# Altium PCB FYS_TMC5160_V1.1.PcbDoc
Units mil, origin at the board's own origin, x right, y up, seen from the top; angles counter-clockwise.
Board outline 600 x 800 mil, 6 copper layers (Top, P1, VMOT, GND, SIG, Bottom), stack 60.357 mil thick; 33 components, 45 nets, 158 pads, 85 vias.
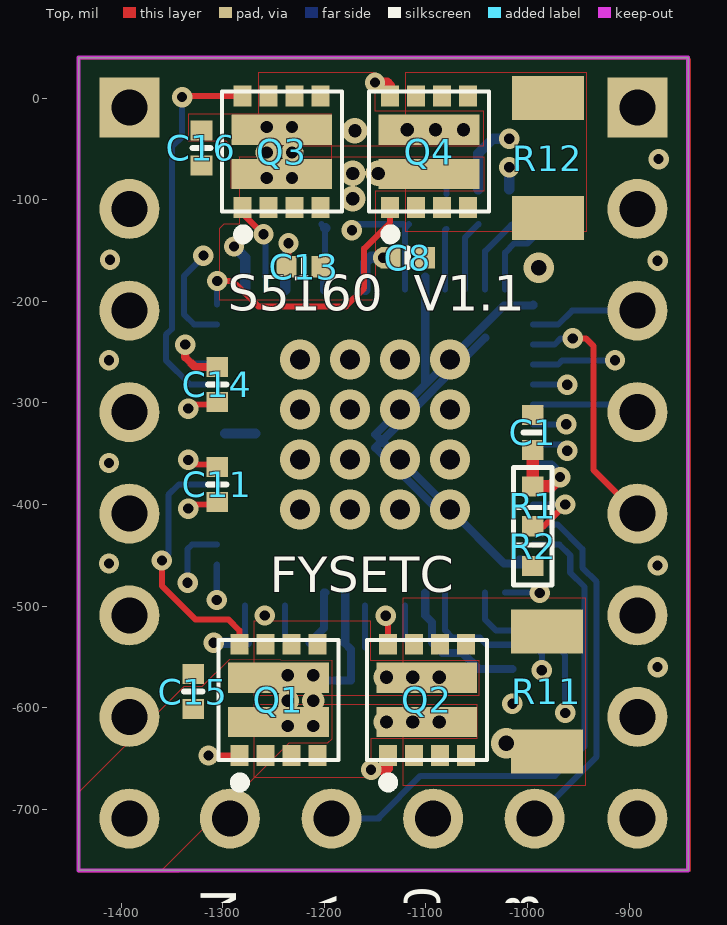
[diagram p0: Top view]
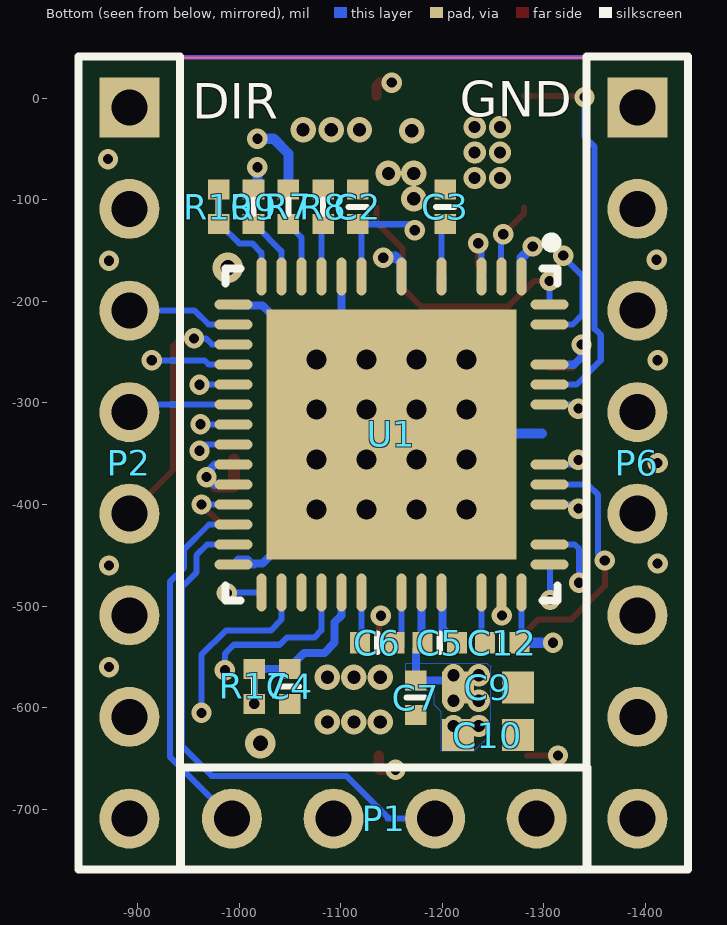
[diagram p1: Bottom view, seen from below]
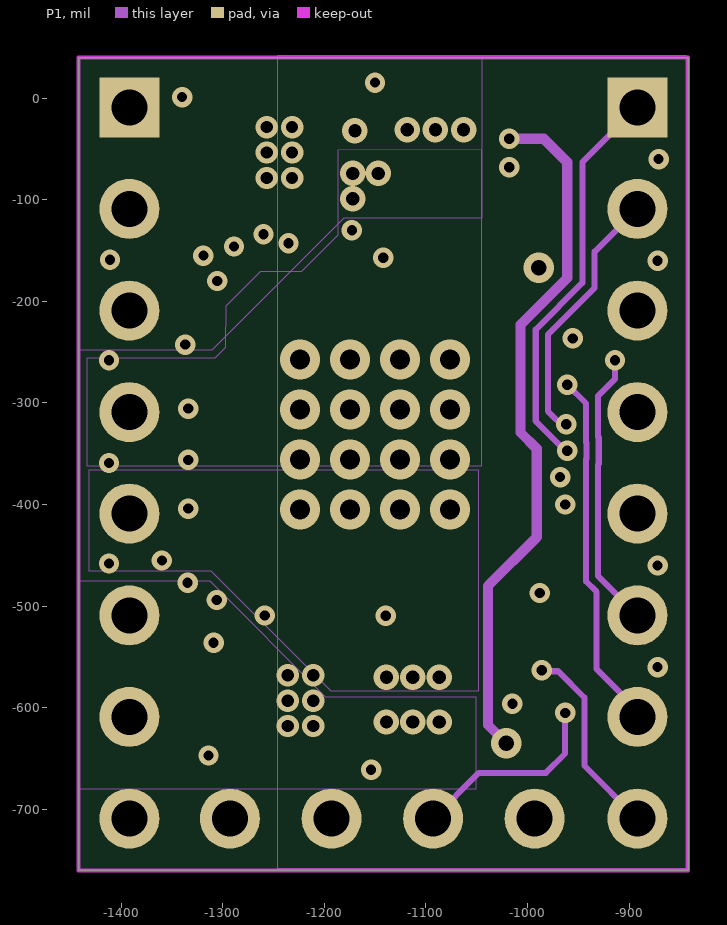
[diagram p2: P1]
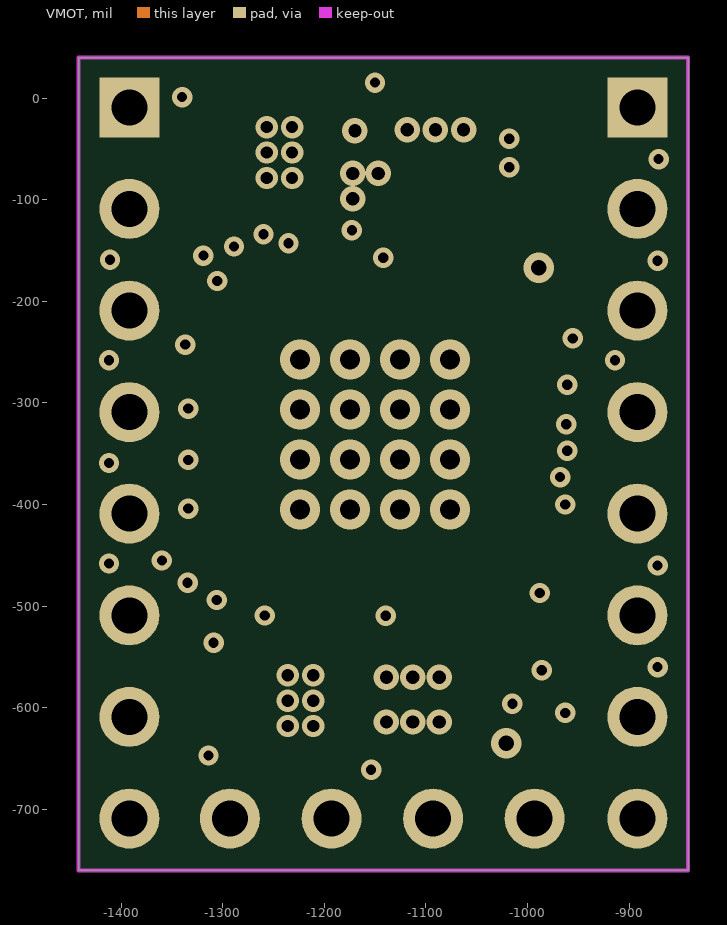
[diagram p3: VMOT]
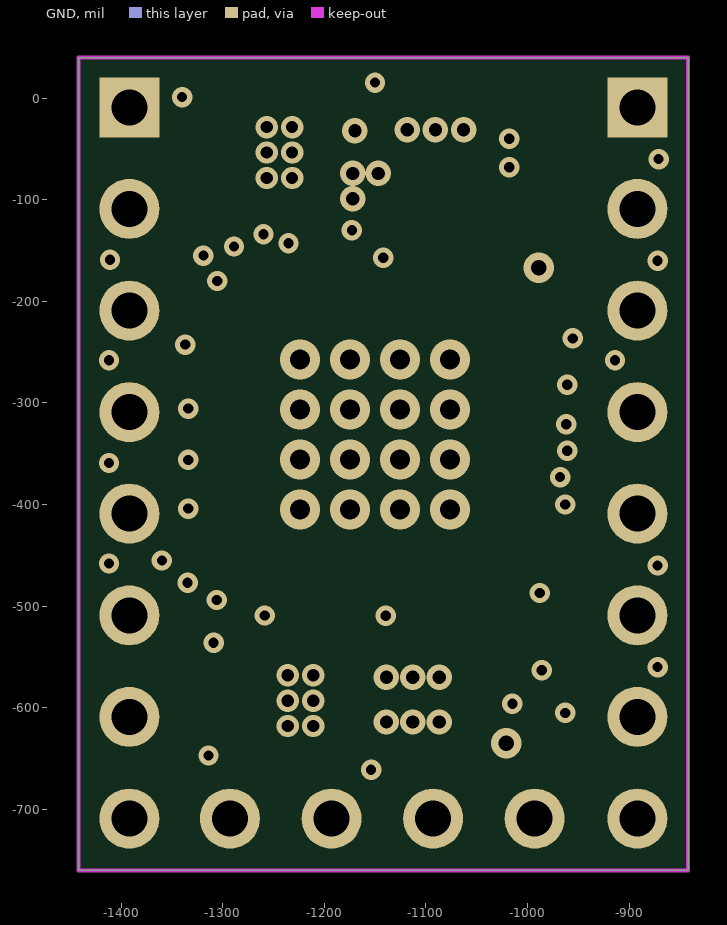
[diagram p4: GND]
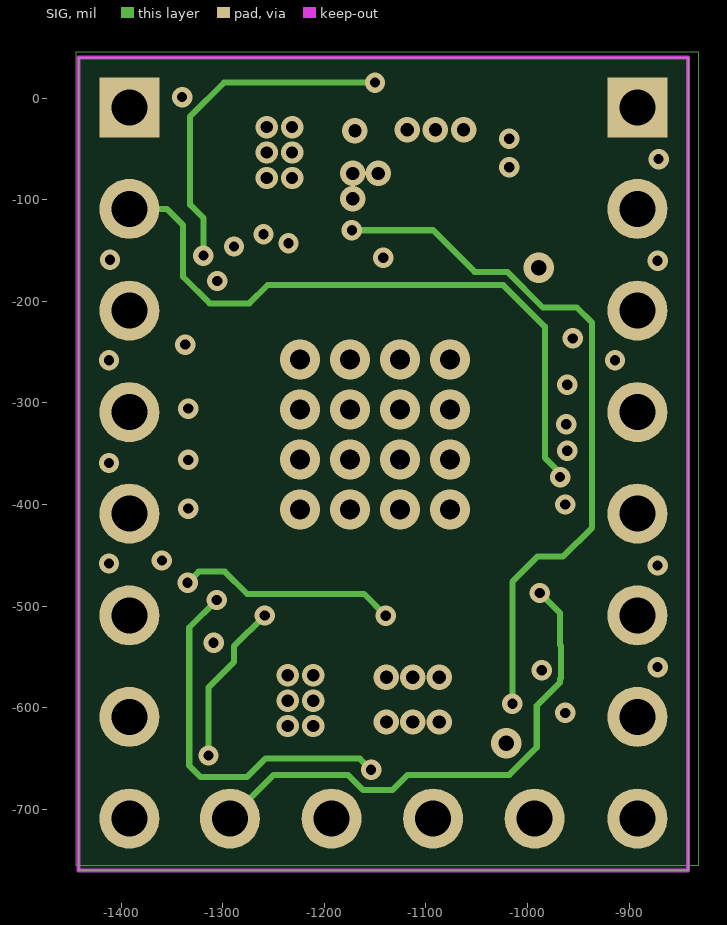
[diagram p5: SIG]

## Layer stack, top to bottom
Top Solder: solder mask 0.4, Solder Resist, Dk 3.5
Top: signal copper 1.378
Dielectric 1: core 10, FR-4, Dk 4.8
P1: signal copper 0.689
Dielectric 2: prepreg 10, FR-4, Dk 4.2
VMOT: signal copper 2.7559
Dielectric 6: prepreg 10, FR-4, Dk 4.2
GND: signal copper 2.7559
Dielectric 5: core 10, FR-4, Dk 4.2
SIG: signal copper 1.4
Dielectric4: core 10, FR-4, Dk 4.2
Bottom: signal copper 1.378
Bottom Solder: solder mask 0.4, Solder Resist, Dk 3.5

## Board outline
-1442,-760 -1442,40 -842,40 -842,-760

## Design rules (kind name [scope] priority, off if disabled: settings)
AssemblyTestPointUsage [All] p0: scope1count=1 scope1_0_kind=Board scope1_0_value=Board scope2count=1 scope2_0_kind=Board scope2_0_value=Board commentlength=0
AssemblyTestpoint [All] p0: scope1count=1 scope1_0_kind=Board scope1_0_value=Board scope2count=1 scope2_0_kind=Board scope2_0_value=Board commentlength=0
Clearance Clearance_1 [All] p0: scope1count=1 scope1_0_kind=Layer scope1_0_value=TOP scope2count=1 scope2_0_kind=Board scope2_0_value=Board commentlength=0 gap=6
Clearance [All] p0: scope1count=1 scope1_0_kind=Board scope1_0_value=Board scope2count=1 scope2_0_kind=Board scope2_0_value=Board commentlength=0 gap=6
Clearance "Mounting Hole Clearance" [All] p0 off: scope1count=1 scope1_0_kind=Board scope1_0_value=Board scope2count=1 scope2_0_kind=Board scope2_0_value=Board commentlength=121 gap=30 // Protel DXP Scope 1 Expression Was: (HoleDiameter >= 110) And  IsPad  And ((PadYSize_AllLayers - HoleDiameter)  <=  1)
Clearance "Fiducial Clearance" [All] p0: scope1count=1 scope1_0_kind=Footprint scope1_0_value=FIDUCIAL_40MIL scope2count=1 scope2_0_kind=Board scope2_0_value=Board commentlength=0 gap=26
Clearance BoardOutlineClearance [All] p0: scope1count=1 scope1_0_kind=Layer scope1_0_value=TOP scope2count=1 scope2_0_kind=Board scope2_0_value=Board commentlength=0 gap=12
Clearance Clearance_1 [OnLayer('Top')] p1: gap=6 ignorepadtopadclearanceinfootprint=TRUE except(0: Arc-Hole Track-Hole SMDPad-Hole THPad-Hole Via-Hole Fill-Hole Poly-Hole Region-Hole Text-Hole; 12: THPad-Poly)
Clearance BoardOutlineClearance [OnLayer('Keep-Out Layer')] p2: gap=12 ignorepadtopadclearanceinfootprint=FALSE
Clearance "Fiducial Clearance" [HasFootprint('FIDUCIAL_40MIL')] p3: gap=26 ignorepadtopadclearanceinfootprint=FALSE except(0: Arc-Hole Track-Hole SMDPad-Hole THPad-Hole Via-Hole Fill-Hole Poly-Hole Region-Hole Text-Hole)
Clearance "Mounting Hole Clearance" [(HoleDiameter >= 110) And  IsPad  And ((PadYSize_AllLayers - HoleDiameter)  <=  1)] p4: gap=30 ignorepadtopadclearanceinfootprint=FALSE except(0: Arc-Hole Track-Hole SMDPad-Hole THPad-Hole Via-Hole Fill-Hole Poly-Hole Region-Hole Text-Hole)
Clearance [All] p5: gap=6 ignorepadtopadclearanceinfootprint=TRUE except(0: Arc-Hole Track-Hole SMDPad-Hole THPad-Hole Via-Hole Fill-Hole Poly-Hole Region-Hole Text-Hole)
ComponentClearance Pinheader2PinheaderClearance [All] p0: scope1count=1 scope1_0_kind=ComponentClass scope1_0_value=Pinheader scope2count=1 scope2_0_kind=ComponentClass scope2_0_value=Pinheader commentlength=0 gap=0 collisioncheckmode=3
ComponentClearance [All] p0: scope1count=1 scope1_0_kind=Board scope1_0_value=Board scope2count=1 scope2_0_kind=Board scope2_0_value=Board commentlength=0 gap=0 collisioncheckmode=3
ComponentClearance Pinheader2PinheaderClearance [InComponentClass('Pinheader') vs InComponentClass('Pinheader')] p1: gap=0 collisioncheckmode=3 verticalgap=0 showdistances=FALSE
ComponentClearance [All] p2: gap=0 collisioncheckmode=3 verticalgap=100000 showdistances=FALSE
DiffPairsRouting [All] p0 off: scope1count=1 scope1_0_kind=Board scope1_0_value=Board scope2count=1 scope2_0_kind=Board scope2_0_value=Board commentlength=0
DiffPairsRouting [All] p1 off: maxlimit=10 minlimit=7.5 mostfreqgap=10 toplayer_prefgap=7.5 toplayer_minwidth=7.5 toplayer_maxwidth=7.5 toplayer_prefwidth=7.5 midlayer1_prefgap=7.5 midlayer1_minwidth=7.5 midlayer1_maxwidth=7.5 midlayer1_prefwidth=7.5 midlayer2_mingap=10 midlayer2_minwidth=15 midlayer2_maxwidth=15 midlayer2_prefwidth=15 midlayer3_mingap=10 midlayer3_minwidth=15 midlayer3_maxwidth=15 midlayer3_prefwidth=15 midlayer4_mingap=10 midlayer4_minwidth=15 midlayer4_maxwidth=15 midlayer4_prefwidth=15 bottomlayer_prefgap=7.5 bottomlayer_minwidth=7.5 bottomlayer_maxwidth=7.5 bottomlayer_prefwidth=7.5 maxuncoupledlength=500
FabricationTestPointUsage [All] p0: scope1count=1 scope1_0_kind=Board scope1_0_value=Board scope2count=1 scope2_0_kind=Board scope2_0_value=Board commentlength=0 valid=0 allowmultiple=FALSE
FabricationTestpoint [All] p0: scope1count=1 scope1_0_kind=Board scope1_0_value=Board scope2count=1 scope2_0_kind=Board scope2_0_value=Board commentlength=0 side=3 testpointundercomponent=TRUE minsize=40 maxsize=100 preferedsize=60 minholesize=0 maxholesize=40 preferedholesize=32 testpointgrid=1
FanoutControl Fanout_Default [All] p0: scope1count=1 scope1_0_kind=Board scope1_0_value=Board scope2count=1 scope2_0_kind=Board scope2_0_value=Board commentlength=30 // Fanout_Default (Default Rule)
FanoutControl Fanout_Small [All] p0 off: scope1count=1 scope1_0_kind=Board scope1_0_value=Board scope2count=1 scope2_0_kind=Board scope2_0_value=Board commentlength=84 // Protel DXP Scope 1 Expression Was: (CompPinCount < 5)   Fanout_Small (Default Rule)
FanoutControl Fanout_SOIC [All] p0 off: scope1count=1 scope1_0_kind=Board scope1_0_value=Board scope2count=1 scope2_0_kind=Board scope2_0_value=Board commentlength=71 // Protel DXP Scope 1 Expression Was: IsSOIC   Fanout_SOIC (Default Rule)
FanoutControl Fanout_LCC [All] p0 off: scope1count=1 scope1_0_kind=Board scope1_0_value=Board scope2count=1 scope2_0_kind=Board scope2_0_value=Board commentlength=69 // Protel DXP Scope 1 Expression Was: IsLCC   Fanout_LCC (Default Rule)
FanoutControl Fanout_BGA [All] p0 off: scope1count=1 scope1_0_kind=Board scope1_0_value=Board scope2count=1 scope2_0_kind=Board scope2_0_value=Board commentlength=69 // Protel DXP Scope 1 Expression Was: IsBGA   Fanout_BGA (Default Rule)
Height [All] p0: scope1count=1 scope1_0_kind=Board scope1_0_value=Board scope2count=1 scope2_0_kind=Board scope2_0_value=Board commentlength=0
HoleSize [All] p0: scope1count=1 scope1_0_kind=Board scope1_0_value=Board scope2count=1 scope2_0_kind=Board scope2_0_value=Board commentlength=0 absolutevalues=TRUE maxlimit=100000 minlimit=7.87 maxpercent=80.000 minpercent=20.000
HoleSize [All] p1: absolutevalues=TRUE maxlimit=100000 minlimit=7.87 maxpercent=80.000 minpercent=20.000
HoleToHoleClearance [All] p0: scope1count=1 scope1_0_kind=Board scope1_0_value=Board scope2count=1 scope2_0_kind=Board scope2_0_value=Board commentlength=0
HoleToHoleClearance [All] p1: gap=8 allowstackedmicrovias=TRUE
LayerPairs [All] p0: scope1count=1 scope1_0_kind=Board scope1_0_value=Board scope2count=1 scope2_0_kind=Board scope2_0_value=Board commentlength=0 enforce=TRUE
MatchedLengths "SD_CARD MatchedLengths" [All] p0: scope1count=1 scope1_0_kind=NetClass scope1_0_value=SD_CARD scope2count=1 scope2_0_kind=Board scope2_0_value=Board commentlength=0 tolerance=10 amplitude=200 gap=20 style=90-Degree
MatchedLengths "SD_CARD MatchedLengths" [InNetClass('SD_CARD')] p1: tolerance=10 checknetsindiffpair=FALSE checkdiffpairvsdiffpair=TRUE checkxsignals=TRUE checkothers=TRUE
MinimumAnnularRing MinimumViaAnnualRing [All] p0: scope1count=1 scope1_0_kind=Board scope1_0_value=Board scope2count=1 scope2_0_kind=Board scope2_0_value=Board commentlength=0 minimumring=4.92
MinimumAnnularRing MinimumViaAnnualRing [All] p1: minimumring=4.92
MinimumSolderMaskSliver STM32_MinimumSolderMaskSliver [All] p0 off: scope1count=1 scope1_0_kind=Board scope1_0_value=Board scope2count=1 scope2_0_kind=Board scope2_0_value=Board commentlength=84 // Protel DXP Scope 2 Expression Was: (InComponent('STM1') AND InComponent('STM2'))
MinimumSolderMaskSliver USB_HUB_MinimumSolderMaskSliver [All] p0: scope1count=1 scope1_0_kind=Component scope1_0_value=USB_HUB scope2count=1 scope2_0_kind=Board scope2_0_value=Board commentlength=0
MinimumSolderMaskSliver [All] p0 off: scope1count=1 scope1_0_kind=Board scope1_0_value=Board scope2count=1 scope2_0_kind=Board scope2_0_value=Board commentlength=0
MinimumSolderMaskSliver STM32_MinimumSolderMaskSliver [(InComponent('STM1') AND InComponent('STM2')) vs (InComponent('STM1') AND InComponent('STM2'))] p1: minsoldermaskwidth=1
MinimumSolderMaskSliver USB_HUB_MinimumSolderMaskSliver [InComponent('USB_HUB')] p2: minsoldermaskwidth=1
MinimumSolderMaskSliver [All] p3 off: minsoldermaskwidth=1.5
NetAntennae [All] p0: scope1count=1 scope1_0_kind=Board scope1_0_value=Board scope2count=1 scope2_0_kind=Board scope2_0_value=Board commentlength=0
PasteMaskExpansion [All] p0: scope1count=1 scope1_0_kind=Board scope1_0_value=Board scope2count=1 scope2_0_kind=Board scope2_0_value=Board commentlength=0 expansion=0
PasteMaskExpansion TestPadPasteMaskExpansion [All] p0: scope1count=1 scope1_0_kind=Footprint scope1_0_value=SMD_TP_2X2_ROUND scope2count=1 scope2_0_kind=Board scope2_0_value=Board commentlength=0 expansion=-78.74
PasteMaskExpansion TestPadPasteMaskExpansion [HasFootprint('SMD_TP_2X2_ROUND')] p1: expansion=-78.74
PasteMaskExpansion [All] p2: expansion=0
PlaneClearance [All] p0: scope1count=1 scope1_0_kind=Board scope1_0_value=Board scope2count=1 scope2_0_kind=Board scope2_0_value=Board commentlength=0 clearance=20
PlaneConnect [All] p0: scope1count=1 scope1_0_kind=Board scope1_0_value=Board scope2count=1 scope2_0_kind=Board scope2_0_value=Board commentlength=0 planeconnectstyle=Direct reliefexpansion=20 reliefentries=4 reliefconductorwidth=10 reliefairgap=10
PlaneConnect [All] p1: planeconnectstyle=Direct reliefexpansion=20 reliefentries=4 reliefconductorwidth=10 reliefairgap=10
PolygonConnect [All] p0: scope1count=1 scope1_0_kind=Board scope1_0_value=Board scope2count=1 scope2_0_kind=Board scope2_0_value=Board commentlength=0 connectstyle=Direct reliefconductorwidth=15 reliefentries=4 polygonreliefangle="90 Angle"
PolygonConnect ThermalVias [All] p0 off: scope1count=1 scope1_0_kind=Board scope1_0_value=Board scope2count=1 scope2_0_kind=Board scope2_0_value=Board commentlength=44 connectstyle=Direct reliefconductorwidth=10 reliefentries=4 polygonreliefangle="90 Angle" // Protel DXP Scope 1 Expression Was: IsVia
PolygonConnect MotorOutputConStyle [All] p0: scope1count=1 scope1_0_kind=NetClass scope1_0_value=MotorPowerOut scope2count=1 scope2_0_kind=Board scope2_0_value=Board commentlength=0 connectstyle=Direct reliefconductorwidth=10 reliefentries=4 polygonreliefangle="90 Angle"
PolygonConnect SA_SB_PolygonConnect [All] p0 off: scope1count=1 scope1_0_kind=Board scope1_0_value=Board scope2count=1 scope2_0_kind=Board scope2_0_value=Board commentlength=65 connectstyle=Direct reliefconductorwidth=70 reliefentries=4 polygonreliefangle="90 Angle" // Protel DXP Scope 1 Expression Was: InNet('SA') OR InNet('SB')
PolygonConnect VM_PolygonConnect [All] p0: scope1count=1 scope1_0_kind=Net scope1_0_value=+VM scope2count=1 scope2_0_kind=Board scope2_0_value=Board commentlength=0 connectstyle=Direct reliefconductorwidth=70 reliefentries=4 polygonreliefangle="90 Angle"
PolygonConnect SA_SB_PolygonConnect [InNet('SA') OR InNet('SB')] p1: connectstyle=Direct reliefconductorwidth=70 reliefentries=4 polygonreliefangle="90 Angle" airgapwidth=10
PolygonConnect VM_PolygonConnect [InNet('+VM')] p2: connectstyle=Direct reliefconductorwidth=70 reliefentries=4 polygonreliefangle="90 Angle" airgapwidth=10
PolygonConnect ThermalVias [IsVia] p3: connectstyle=Direct reliefconductorwidth=10 reliefentries=4 polygonreliefangle="90 Angle" airgapwidth=10
PolygonConnect MotorOutputConStyle [InNetClass('MotorPowerOut')] p4: connectstyle=Direct reliefconductorwidth=10 reliefentries=4 polygonreliefangle="90 Angle" airgapwidth=10
PolygonConnect [All] p5: connectstyle=Direct reliefconductorwidth=15 reliefentries=4 polygonreliefangle="90 Angle" airgapwidth=10
RoutingCorners [All] p0: scope1count=1 scope1_0_kind=Board scope1_0_value=Board scope2count=1 scope2_0_kind=Board scope2_0_value=Board commentlength=0 cornerstyle=45-Degree minsetback=100 maxsetback=100
RoutingLayers [All] p0: scope1count=1 scope1_0_kind=Board scope1_0_value=Board scope2count=1 scope2_0_kind=Board scope2_0_value=Board commentlength=0 top layer=Automatic mid layer 1=Automatic mid layer 2=Automatic mid layer 3=Automatic mid layer 4=Automatic bottom layer=Automatic
RoutingPriority [All] p0: scope1count=1 scope1_0_kind=Board scope1_0_value=Board scope2count=1 scope2_0_kind=Board scope2_0_value=Board commentlength=0
RoutingTopology [All] p0: scope1count=1 scope1_0_kind=Board scope1_0_value=Board scope2count=1 scope2_0_kind=Board scope2_0_value=Board commentlength=0 topology=Shortest
RoutingVias [All] p0: scope1count=1 scope1_0_kind=Board scope1_0_value=Board scope2count=1 scope2_0_kind=Board scope2_0_value=Board commentlength=0 holewidth=12 width=22 viastyle="Through Hole" minholewidth=12 minwidth=22 maxholewidth=12 maxwidth=50
RoutingVias [All] p1: holewidth=12 width=22 viastyle="Through Hole" minholewidth=12 minwidth=22 maxholewidth=12 maxwidth=50
ShortCircuit [All] p0 off: scope1count=1 scope1_0_kind=Board scope1_0_value=Board scope2count=1 scope2_0_kind=Board scope2_0_value=Board commentlength=0 allowed=FALSE
ShortCircuit [All] p1 off: allowed=FALSE
SilkToBoardRegionClearance [All] p0 off: scope1count=1 scope1_0_kind=Board scope1_0_value=Board scope2count=1 scope2_0_kind=Board scope2_0_value=Board commentlength=0
SilkToBoardRegionClearance [All] p1 off:
SilkToSilkClearance [All] p0 off: scope1count=1 scope1_0_kind=Board scope1_0_value=Board scope2count=1 scope2_0_kind=Board scope2_0_value=Board commentlength=0
SilkToSilkClearance [All] p1 off: silktosilkclearance=10
SilkToSolderMaskClearance [All] p0 off: scope1count=1 scope1_0_kind=Board scope1_0_value=Board scope2count=1 scope2_0_kind=Board scope2_0_value=Board commentlength=44 // Protel DXP Scope 1 Expression Was: IsPad
SilkToSolderMaskClearance [IsPad] p1 off: minsilkscreentomaskgap=10 clearancetoexposedcopper=TRUE
SolderMaskExpansion [All] p0: scope1count=1 scope1_0_kind=Board scope1_0_value=Board scope2count=1 scope2_0_kind=Board scope2_0_value=Board commentlength=0 expansion=4
SolderMaskExpansion FiducialSolderMaskExpansion [All] p0: scope1count=1 scope1_0_kind=Footprint scope1_0_value=FIDUCIAL_40MIL scope2count=1 scope2_0_kind=Board scope2_0_value=Board commentlength=0 expansion=26
SolderMaskExpansion FiducialSolderMaskExpansion [HasFootprint('FIDUCIAL_40MIL')] p1: expansion=26
SolderMaskExpansion [All] p2: expansion=4
UnRoutedNet [All] p0 off: scope1count=1 scope1_0_kind=Board scope1_0_value=Board scope2count=1 scope2_0_kind=Board scope2_0_value=Board commentlength=0
UnRoutedNet [All] p1 off:
UnpouredPolygon [All] p0: scope1count=1 scope1_0_kind=Board scope1_0_value=Board scope2count=1 scope2_0_kind=Board scope2_0_value=Board commentlength=0
Width VIN_Width [All] p0: scope1count=1 scope1_0_kind=NetClass scope1_0_value=PWR_VIN scope2count=1 scope2_0_kind=Board scope2_0_value=Board commentlength=0 maxlimit=300 minlimit=200 preferedwidth=210
Width Other_Width [All] p0: scope1count=1 scope1_0_kind=Board scope1_0_value=Board scope2count=1 scope2_0_kind=Board scope2_0_value=Board commentlength=0 maxlimit=100000 minlimit=5 preferedwidth=11.81
Width VIN_Width [InNetClass('PWR_VIN')] p1: maxlimit=300 minlimit=200 preferedwidth=210
Width Other_Width [All] p2: maxlimit=100000 minlimit=5 preferedwidth=11.81 midlayer3_prefwidth=10 midlayer4_prefwidth=10 minimp=50.000000 maximp=50.000000 favimp=50.000000
18 further rules are at their usual default settings.

## Classes and differential pairs
net class MotorPowerOut: BMA1 BMA2 BMB1 BMB2

## Components (designator, comment, footprint, x,y, rotation, side; value= is the part's Value field where it differs from the comment)
C1 "100nF" CAP0402_NS -995,-329 r90 top
C2 "2u2" CAP0402_NS -1117,-107 r90 bottom
C3 "2u2" CAP0402_NS -1203,-107 r270 bottom
C4 "470nF" CAP0402_NS -1050.07,-579 r270 bottom
C5 "100nF" CAP0402_NS -1197.5,-536 r180 bottom
C6 "22nF" CAP0402_NS -1136,-536 r180 bottom
C7 "100nF" CAP0402_NS -1174,-590.06 r270 bottom
C8 "100nF" CAP0402_NS -1117.94,-157 r0 top
C9 "10uF/50V/10%" CAP0603 -1245,-580 r0 bottom
C10 "10uF/50V/10%" CAP0603 -1245,-627 r0 bottom
C11 "220nF" CAP0402_NS -1305.51,-380.21 r270 top
C12 "220nF" CAP0402_NS -1259,-536 r180 bottom
C13 "220nF" CAP0402_NS -1220,-166 r0 top
C14 "220nF" CAP0402_NS -1305.51,-281.79 r90 top
C15 "470nF/50V" CAP0402_NS -1329,-584 r90 top
C16 "470nF/50V" CAP0402_NS -1321,-49 r270 top
P1 "Header 4" HDR1X4 -993,-709 r180 bottom locked
P2 "Header 8" HDR1X8 -892,-9 r270 bottom locked
P6 "Header 8" HDR1X8 -1392,-9 r270 bottom locked
Q1 "FDMC9430L" DFN3X3-511DG -1410.18,-592.5 r0 top locked
Q2 "FDMC9430L" DFN3X3-511DG -1264.18,-592.5 r0 top locked
Q3 "FDMC9430L" DFN3X3-511DG -1407,-53 r0 top locked
Q4 "FDMC9430L" DFN3X3-511DG -1262,-53 r0 top locked
R1 "0R" RES0402 -995,-401.68 r270 top
R2 "0R" RES0402 -995,-441 r270 top
R7 "47R /  / 1%" RES0402_NS -1048.5,-107 r270 bottom
R8 "47R /  / 1%" RES0402_NS -1082.75,-107 r270 bottom
R9 "47R /  / 1%" RES0402_NS -1014.25,-107 r270 bottom
R10 "47R /  / 1%" RES0402_NS -980,-106.68 r270 bottom
R11 "75mR" R1206 -981,-584 r90 top
R12 "75mR" R1206 -980,-59 r270 top
R17 "2R2/1%/" RES0402_NS -1015,-579 r90 bottom
U1 "TMC5160_WA" "QFN8X8 WETTABLE" -1150,-331 r270 bottom

## Footprints (in the part's own frame and the unit in brackets; to place one, negate y for a bottom-side part, rotate by r counter-clockwise, add the part's x,y. Pads: shape width x height; smd on the part's side, far side on the other; paste and mask are expansions set on the pad)
CAP0402_NS [mm]
  rect 0.5x0.54 smd: 1(-0.433,0) 2(0.433,0)
  silkscreen extent 0,-0.23 0,0.23
CAP0603 [mm]
  rect 0.8x0.8 smd mask+0: 1(-0.75,0) 2(0.75,0)
DFN3X3-511DG [mm] "QFN, 8-Leads, Body 3.15x3.00mm, Pitch 0.65mm, Thermal Pad 2.45x1.74mm, IPC Medium Density"
  rect 0.45x0.52 smd: 1(3.216,-1.386) 2(3.866,-1.386) 3(4.516,-1.386) 4(5.166,-1.386) 5(5.166,1.398) 6(4.516,1.398) 7(3.866,1.398) 8(3.216,1.398)
  rect 2.52x0.755 smd: 9(4.191,-0.546) 10(4.191,0.559)
  silkscreen extent 2.69,-2.18 5.69,1.51
HDR1X4 [mm] "Connector; Header; 4 Position"
  round 1.5 hole 0.9 mask+0: 1(0,0) 2(2.54,0) 3(5.08,0) 4(7.62,0)
  silkscreen extent -1.27,-1.27 8.89,1.27
HDR1X8 [mm] "Connector; Header; 8 Position"
  rect 1.5x1.5 hole 0.9 mask+0: 1(0,0)
  round 1.5 hole 0.9 mask+0: 2(2.54,0) 3(5.08,0) 4(7.62,0) 5(10.16,0) 6(12.7,0) 7(15.24,0) 8(17.78,0)
  silkscreen extent -1.27,-1.27 19.05,1.27
"QFN8X8 WETTABLE" [mm] "QFN, 56-Leads, Body 8.00x8.00mm, Pitch 0.50mm, Thermal Pad 6.25x6.25mm, IPC Low Density"
  oval 0.95x0.25 smd mask+0: 1(-3.95,3.25) 2(-3.95,2.75) 3(-3.95,2.25) 4(-3.95,1.25) 5(-3.95,0.25) 6(-3.95,-0.75) 7(-3.95,-1.25) 8(-3.95,-1.75) 9(-3.95,-2.25) 10(-3.95,-2.75) 11(-3.95,-3.25) 26(3.95,-3.25) 27(3.95,-2.75) 28(3.95,-2.25) 29(3.95,-1.75) 30(3.95,-1.25) 31(3.95,-0.75) 32(3.95,0.25) 33(3.95,0.75) 34(3.95,1.25) 35(3.95,2.25) 36(3.95,2.75) 37(3.95,3.25)
  oval 0.25x0.95 smd mask+0: 12(-3.25,-3.95) 13(-2.75,-3.95) 14(-2.25,-3.95) 15(-1.75,-3.95) 16(-1.25,-3.95) 17(-0.75,-3.95) 18(-0.25,-3.95) 19(0.25,-3.95) 20(0.75,-3.95) 21(1.25,-3.95) 22(1.75,-3.95) 23(2.25,-3.95) 24(2.75,-3.95) 25(3.25,-3.95) 38(3.25,3.95) 39(2.75,3.95) 40(1.75,3.95) 41(1.25,3.95) 42(0.75,3.95) 43(-0.75,3.95) 44(-1.25,3.95) 45(-1.75,3.95) 46(-2.75,3.95) 47(-3.25,3.95)
  rect 6.25x6.25 smd mask+0: 48(0,0)
  silkscreen extent -4.92,-4.15 4.15,4.15
R1206 [mm] "1206 resistor"
  rect 1.1x1.8 smd mask+0: 1(-1.5,0) 2(1.5,0)
RES0402 [mm]
  rect 0.5x0.54 smd mask+0: 1(-0.5,0) 2(0.5,0)
  silkscreen extent -0.97,-0.48 0.97,0.48
RES0402_NS [mm]
  rect 0.5x0.54 smd: 1(-0.433,0) 2(0.433,0)
  silkscreen extent -0.18,0 0.18,0

## Part data
C1 C4 C5 C6 C7 C8: library part Capacitor, "Ceramic capacitor"
C2 C3: library part "2.2 μF, 25 V, ± 10%, X5R, GRM Series", "SMD Multilayer Ceramic Capacitor, 0603 [1608 Metric], 2.2 μF, 25 V, ± 10%, X5R, GRM Series"
C9 C10: library part "10 μF, 50 V, ± 20%, X5R, GRM Series", "SMD Multilayer Ceramic Capacitor, 1206 [3216 Metric], 10 μF, 50 V, ± 20%, X5R, GRM Series"
C11 C12 C13 C14: library part "0.22 μF, 50 V, ± 10%, X7R", "SMD Multilayer Ceramic Capacitor, 0603 [1608 Metric], 0.22 μF, 50 V, ± 10%, X7R, GCM Series"
C15 C16: library part "0.47 μF, 50 V, ± 10%, X7R, C Series", "SMD Multilayer Ceramic Capacitor, 0603 [1608 Metric], 0.47 μF, 50 V, ± 10%, X7R, C Series"
P1: "Header, 4-Pin"
P2 P6: "Header, 8-Pin"
R1 R2: library part "0 ohm, 0603 [1608 Metric], 100 mW, MCWR Series", "SMD Chip Resistor, Thick Film, 0 ohm, 0603 [1608 Metric], 100 mW, MCWR Series"
R7 R8 R9 R10: library part "47 ohm, 75 V, 0603 [1608 Metric], 100 mW, ± 1%, MCSR 06 Series", "SMD Chip Resistor, Ceramic, 47 ohm, 75 V, 0603 [1608 Metric], 100 mW, ± 1%, MCSR 06 Series"
R11 R12: library part "R_SENS, 0.075 ohm, 1206, 1W, ± 1%, ERJ Series", "SMD Chip Resistor, Thick Film, Current Sense Resistors - SMD 1W 0.075ohm 1%"
R17: library part Resistor, "Resistor"

## Via types
v1: diameter 20, hole 10, Top to Bottom, tented both sides, 42 vias
v2: diameter 39.37, hole 19.68, Top to Bottom, tented both sides, 16 vias
v3: diameter 25, hole 13, Top to Bottom, tented both sides, 13 vias
v4: diameter 22, hole 12, Top to Bottom, tented both sides, 12 vias
v5: diameter 30, hole 15, Top to Bottom, tented both sides, 2 vias

## Nets (pads, with @x,y where several pads share a name; then routed paths per layer and width w, separated by ;. In a path a pad name is that pad's centre, name@x,y a point inside that pad or via, vN(x,y) a via of type N, cw(c..) or ccw(c..) an arc to the next point about the centre after c; other vN are vias at no path point)
5V_OUT: C2.1 R17.1 U1.6 | length 815.6
  SIG w6: v1(-1173,-130) -1093,-130 -1052,-171 -1020,-171 -985,-206 -951.58,-206 -936.58,-221 -936.58,-422.58 -965,-451 -990,-451 -1015,-476 v1(-1015,-596)
  Bottom w6: v1(-1173,-130) -1167.06,-124.06 C2.1@-1122,-124.06 ; U1.6@-1120.47,-188.49 U1.6 -1120.47,-128.16 -1120.47,-127.53 C2.1
+VM: C5.1 C7.1 C8.1 C9.2 C10.2 C15.1 C16.1 P6.8 Q1.9 Q1.10 Q3.9 Q3.10 U1.5 U1.33 | length 209.7
  Top w10: v1(-1142,-157) -1137,-157 C8.1@-1136,-156
  Bottom w8: C9.2@-1211.47,-580 -1204.47,-573 C7.1 -1174,-542.44 C5.1 -1179.53,-535.09 U1.33
  Bottom w10: U1.5@-1159.84,-188.49 U1.5@-1159.84,-161.84 ; U1.5 U1.5@-1159.84,-161.84 ; U1.5@-1159.84,-161.84 -1154,-156 ; -1154,-156 -1143,-156 v1(-1142,-157) -1153,-157 -1154,-156
  other v4: -1236,-618 -1211,-618 -1236,-593 -1211,-593 -1236,-568 -1211,-568 -1256.81,-78.5 -1231.81,-78.5 -1256.81,-53.5 -1231.81,-53.5 -1256.81,-28.5 -1231.81,-28.5
BMA1: C11.2 P6.5 Q1.5 Q1.6 Q1.7 Q2.10 U1.40 | length 60.4
  Top w6: v1(-1334,-404) -1329.9,-399.9 C11.2@-1305.51,-399.9
  Bottom w6: v1(-1334,-404) -1329.9,-399.9 U1.40
  other v3: -1139,-570 -1113,-570 -1087,-570
BMA2: C12.2 P6.6 Q1.2 Q1.3 Q1.4 Q2.9 U1.37 | length 67.6
  Bottom w6: U1.37@-1277.95,-499.51 -1277.95,-533.73 C12.2@-1277.68,-534
  Bottom w10: v1(-1309,-536) C12.2
  other v3: -1139,-614 -1113,-614 -1087,-614
BMB1: C13.2 P6.4 Q3.2 Q3.3 Q3.4 Q4.9 U1.1 | length 47.1
  Bottom w10: v1(-1289,-146) -1277.95,-157.05 U1.1 U1.1@-1277.95,-188.49
  other v3: -1172,-99 -1172,-74 -1147,-74
BMB2: C14.2 P6.3 Q3.5 Q3.6 Q3.7 Q4.10 U1.45 | length 94.8
  Top w8: v1(-1337,-242.57) -1337,-255 -1327.25,-264.75 C14.2
  Bottom w8: v1(-1337,-242.57) -1337,-255 -1329.9,-262.1 U1.45
  other v3: -1170,-32 -1118.5,-31 -1090.75,-31 -1063,-31
CA1: C11.1 U1.42 | length 60.7
  Top w6: v1(-1334,-356) -1329.47,-360.53 C11.1@-1305.51,-360.53
  Bottom w6: v1(-1334,-356) -1329.47,-360.53 U1.42
CA2: C12.1 U1.35 | length 34.5
  Bottom w6: C12.1@-1238.58,-534 U1.35@-1238.58,-499.51
CB1: C13.1 U1.3 | length 73.5
  Top w6: C13.1@-1240.94,-171.31 C13.1@-1240.94,-166 ; C13.1 -1235.41,-164.35 v1(-1235.41,-142.83)
  Bottom w6: U1.3 v1@-1238.58,-142.83 ; U1.3@-1237.27,-177.7 U1.3@-1237.27,-175.49
  Bottom w10: U1.3@-1238.58,-188.49 U1.3@-1238.58,-179.01
CB2: C14.1 U1.43 | length 60.4
  Top w6: v1(-1334,-305.57) -1329.9,-301.47 C14.1@-1305.51,-301.47
  Bottom w6: v1(-1334,-305.57) -1329.9,-301.47 U1.43
CLK16: P2.3 U1.13 | length 108.2
  Bottom w6: U1.13 -970,-222.73 -956.27,-209 P2.3
CSN: P2.5 U1.14 | length 252.9
  Top w6: v1(-955.58,-236.42) -942.61,-236.42 -935,-244.02 -935,-366 P2.5
  Bottom w6: U1.14 -973.42,-242.42 -967.42,-236.42 v1(-955.58,-236.42) v1@-950.58,-236.42
DIAG0/ERROR: P1.2 U1.27 | length 365.4
  P1 w6: P1.2 -1048,-664 -982,-664 -963,-645 v1(-963,-605)
  Bottom w6: U1.27 -1041.73,-513.27 -1031,-524 -987,-524 -963,-548 v1@-963,-597
DIAG1/INDEX: U1.28
DIR/REFR: P2.1 U1.19 | length 432.9
  P1 w6: v1(-961,-347) -962.87,-347 -992,-317.87 -992,-227.8 -946,-181.8 -946,-63 P2.1
  Bottom w6: U1.19 -967.16,-340.84 v1(-961,-347) ; v1@-958.5,-344.5 v1@-956,-347
DRV_ENN: P2.8 U1.29 | length 351.4
  P1 w6: v1@-986,-564 -970,-564 -944,-590 -944,-657 P2.8
  Bottom w6: U1.29 -1081.1,-523.9 -1074,-531 -1047,-531 -1040,-538 -995,-538 -987.95,-545.05 -986,-547 v1(-986,-563)
ENCA: P1.3 U1.24 | length 513.9
  Bottom w6: P1.3 -1146.23,-709 -1146.23,-707.74 -1105.49,-667 -973.03,-667 -944,-637.97 -944,-481 -958,-467 -958,-450 -968.73,-439.27 U1.24
ENCB: P1.1 U1.23 | length 354.7
  Bottom w6: U1.23 -970.42,-419.58 -946,-444 -946,-462.03 -932,-476.03 -932,-648 P1.1
ENCN: P1.4 U1.26 | length 539.2
  SIG w6: P1.4 -1250,-666 -1176.87,-666 -1161.87,-681 -1133,-681 -1118,-666 -1018.06,-666 -991,-638.94 -991,-598 -968,-575 -968,-571.87 -967,-570.87 -967,-555.13 -967.13,-555 -967,-554.87 -967,-539.13 -968,-538.13 -968,-507 v1(-988,-487)
  Bottom w6: U1.26 v1@-997,-486.51
GND: C1.2 C2.2 C3.1 C4.2 C7.2 C8.2 C9.1 C10.1 C15.2 C16.2 P6.1 P6.7 R2.2 R8.1 R10.1 R11.2 R12.2 U1.7 U1.12 U1.25 U1.48 | length 828.9
  Bottom w6: R8.1@-1080,-94.36 R8.1@-1080,-89.31
  Bottom w8: U1.7 U1.48@-1100.79,-281.79 ; U1.48@-1085.04,-408.96 -1150,-344 U1.48@-1143.5,-337.5 ; U1.48@-1041.73,-235.73 U1.48@-1143.5,-337.5 ; U1.12 -994.49,-204.19 -1023.19,-204.19 U1.48@-1100.79,-281.79 ; U1.48@-1143.5,-337.5 v2(-1125.39,-355.61) v2(-1076.18,-404.82) -1023.19,-457.81 -1015.87,-457.81 ; U1.48@-1143.5,-337.5 U1.48 U1.48@-1100.79,-281.79 ; -1015.87,-457.81 -1011.89,-457.81 -1008.27,-454.19 -999.25,-454.19 U1.25 -1014.72,-458.95 -1015.87,-457.81
  Bottom w10: -1298,-330 U1.48@-1268,-330
  other v1: -872,-560 -872,-460 -1412,-458 -1412,-359 -1412,-258 -872,-160 -1411,-159 -871,-60
  other v2: -1223.82,-404.82 -1174.61,-404.82 -1125.39,-404.82 -1223.82,-355.61 -1174.61,-355.61 -1076.18,-355.61 -1223.82,-306.39 -1174.61,-306.39 -1125.39,-306.39 -1076.18,-306.39 -1223.82,-257.18 -1174.61,-257.18 -1125.39,-257.18 -1076.18,-257.18
  other v5: -989,-167
HA1: Q1.8 U1.41 | length 252.5
  Top w6: v1(-1360,-455) -1360,-480 -1327,-513 -1294.57,-513 -1283.57,-524 Q1.8
  Bottom w6: v1(-1360,-455) -1353.47,-448.47 -1353.47,-390.47 -1343.21,-380.21 U1.41
HA2: Q1.1 U1.36 | length 189.1
  Top w6: v1@-1311.94,-647.06 Q1.1
  SIG w6: v1(-1314,-647) -1314,-580 -1289,-555 -1289,-539.52 v1(-1258.68,-509.2)
HB1: Q3.1 U1.2 | length 66.2
  Top w6: Q3.1 -1280.39,-113.79 -1261.17,-133 v1@-1260,-133
  Bottom w6: U1.2 -1258,-175.22 -1258,-144
  other v1: -1260,-134
HB2: Q3.8 U1.44 | length 386
  Top w6: v1(-1340,1) -1338.94,2.06 Q3.8
  Bottom w6: v1(-1340,1) -1340,-37.89 -1350,-47.89 -1350,-227 -1356,-233 -1356,-258 -1332.21,-281.79 U1.44
LA1: Q2.8 U1.39 | length 308.3
  Top w6: Q2.8 v1@-1137.57,-510.43
  SIG w6: v1(-1334.63,-477) -1323.63,-466 -1298,-466 -1276,-488 -1161,-488 v1@-1140,-509
  Bottom w6: v1(-1334.63,-477) -1334.63,-443.63 -1330.27,-439.27 U1.39
  other v1: -1139.57,-509.43
LA2: Q2.1 U1.38 | length 434.5
  Top w10: v1(-1154,-661) -1139,-661 -1137.57,-659.57 Q2.1
  SIG w6: v1(-1306,-494) -1333,-521 -1333,-657 -1322,-668 -1276,-668 -1258,-650 -1165,-650 v1(-1154,-661)
  Bottom w6: v1(-1306,-494) -1306,-459.44 U1.38
LB1: Q4.1 U1.47 | length 274.9
  Top w6: v1@-1305,-180 -1290,-180 -1265,-205 -1179,-205 -1161,-187 -1161,-148.06 -1135.39,-122.45 Q4.1
  Bottom w6: U1.47 v1(-1305.51,-180)
LB2: Q4.8 U1.46 | length 467.2
  Top w10: v1(-1150.24,15.29) -1138.29,15.29 -1135.39,12.39 Q4.8
  SIG w6: v1(-1319.13,-155) -1319.13,-117.87 -1332.13,-104.87 -1332.13,-18 -1298.84,15.29 v1(-1150.24,15.29)
  Bottom w6: v1@-1318.13,-155 -1338,-174.87 -1338,-213 -1328.27,-222.73 U1.46
NetC3_2: C3.2 U1.4 | length 66.3
  Bottom w6: C3.2 -1199.21,-127.82 -1199.21,-127.9 U1.4
  Bottom w10: U1.4@-1199.21,-188.49 U1.4 ; C3.2@-1199.21,-127.9 C3.2@-1199,-127.68
NetC5_2: C5.2 U1.34 | length 56.5
  Bottom w8: C5.2 -1200.28,-521.75 -1200.28,-486.51 U1.34
NetC6_1: C6.1 U1.31 | length 35
  Bottom w6: U1.31@-1120.47,-499.51 -1120.47,-532.84 C6.1@-1119.31,-534
NetC6_2: C6.2 U1.32 | length 41.3
  Bottom w6: C6.2@-1159.84,-540.84 U1.32@-1159.84,-499.51
SA: Q2.2 Q2.3 Q2.4 Q2.5 Q2.6 Q2.7 R7.1 R11.1 | length 766.3
  P1 w10: v5@-1019,-637 v5(-1021,-635) -1039,-617 -1039,-480 -991,-432 -991,-345 -1007,-329 -1007,-223 -961,-177 -961,-63 -984,-40 v1(-1018,-40)
  Bottom w10: R7.1 -1048.5,-54.5 -1034,-40 v1(-1018,-40)
SB: Q4.2 Q4.3 Q4.4 Q4.5 Q4.6 Q4.7 R9.1 R12.1 | length 22
  Bottom w10: R9.1@-1018,-89.95 v1(-1018,-68)
SCK: P2.6 U1.15 | length 356.4
  P1 w6: v1(-914,-258) -914,-276.51 -930.53,-293.04 -930.53,-333.63 -930,-334.16 -930,-359.84 -930.53,-360.37 -930.53,-470.47 -906.51,-494.49 P2.6
  Bottom w6: U1.15 -970,-262.1 -966,-258.1 -914.1,-258.1 v1(-914,-258)
SD_MODE: C1.1 P6.2 R1.1 U1.20 U1.21 | length 776.6
  Top w12: C1.1@-995,-355.68 R1.1 -977,-382 v1(-968,-373)
  SIG w6: P6.2 -1355,-109 -1339,-125 -1339,-176 -1313,-202 -1274,-202 -1256,-184 -1024,-184 -983,-225 -983,-354 -968,-369 v1(-968,-373)
  Bottom w8: U1.21 -975.21,-380.21 v1(-968,-373) -968,-369 -976.47,-360.53 U1.20
SDI: P2.7 U1.16 | length 369
  P1 w6: v1(-961,-282) -942.53,-300.47 -942.53,-338.6 -942,-339.13 -942,-354.87 -942.53,-355.4 -942.53,-475.44 -932,-485.97 -932,-562 P2.7@-900,-594
  Bottom w6: U1.16 v1@-963.21,-281.79
SDO: P2.4 U1.17 | length 105.6
  Bottom w6: U1.17 -899.53,-301.47 P2.4
SPI_MODE: R1.2 R2.1 U1.22 | length 72.3
  Top w6: R2.1 -984.31,-421.31 v1(-963,-400)
  Bottom w6: U1.22 v1@-963,-399.9
SRAH: R7.2 U1.9 | length 69.8
  Bottom w6: U1.9@-1061.42,-188.49 U1.9 -1061.42,-136.96 R7.2
SRAL: R8.2 U1.8 | length 60.3
  Bottom w6: U1.8@-1081.1,-188.49 -1081.1,-129.79 R8.2@-1080,-128.68
SRBH: R9.2 U1.10 | length 83.7
  Bottom w6: U1.10@-1041.73,-188.49 U1.10 -1041.73,-150.48 -1016.24,-124.98 R9.2@-1013.31,-124.98 ; R9.2@-1014.39,-127.66 -1011.72,-124.98 R9.2@-1013.31,-124.98 ; R9.2 R9.2@-1013.31,-124.98
SRBL: R10.2 U1.11 | length 89
  Bottom w6: U1.11@-1022.05,-188.49 U1.11 -1022.05,-152.05 -1013,-143 -1000,-143 -982,-125 R10.2@-982,-123.73
STEP/REFL: P2.2 U1.18 | length 295.4
  P1 w6: v1@-962,-326 -980,-308 -980,-232.77 -934,-186.77 -934,-151 P2.2
  Bottom w6: U1.18 -966.84,-321.16 v1@-962,-326
  other v1: -962,-321
VCC: C4.1 R17.2 U1.30 | length 144.2
  Bottom w8: U1.30 -1100.79,-509.11 -1094.1,-515.8 -1094.1,-535.9 -1084,-546 -1063.9,-546 C4.1@-1047.94,-561.95 ; C4.1 C4.1@-1047.94,-561.95 ; R17.2 C4.1@-1047.94,-561.95

## Polygon pours and split planes (outlines as drawn)
GND on Top "GND_L01_P177" (solid, pour order 177): -1343,-762 -1442,-762 -1442,39 -840,39 -840,-761
+VM on Top "NONET_L01_P-001" (solid, pour order 171): -1193,-88 -1193,-16 -1332,-16 -1334,-16 -1334,-42 -1297,-42 -1292,-47 -1292,-88
+VM on Top "NONET_L01_P-001" (solid, pour order 165): -1193,-553 -1193,-631 -1197,-635 -1235.19,-635 -1360.19,-760 -1442,-760 -1442,-683 -1338,-579 -1320,-579 -1293,-552
BMA1 on Top "NONET_L01_P-001" (solid, pour order 159): -1269.56,-515 -1269.56,-587.5 -1047.56,-587.5 -1047.56,-553.5 -1154.56,-553.5 -1154.56,-515
SB on Top "NONET_L01_P-001" (solid, pour order 157): -1120.5,25 -1120.5,-131 -942,-131 -942,25
BMB2 on Top "NONET_L01_P-001" (solid, pour order 155): -1150,25 -1265,25 -1265,-47 -1043,-47 -1043,-13 -1150,-13
BMB1 on Top "NONET_L01_P-001" (solid, pour order 153): -1303,-128.25 -1298.54,-123.79 -1283.36,-123.79 -1283.36,-58.64 -1284,-57.5 -1043,-57.5 -1043,-91.5 -1150,-91.5 -1150,-199 -1303,-199
SA on Top "NONET_L01_P-001" (solid, pour order 151): -1122.69,-492.32 -1122.68,-676.32 -943,-676.32 -943,-492.32
BMA2 on Top "NONET_L01_P-001" (solid, pour order 145): -1269.19,-669 -1269.19,-596.5 -1050.07,-596.5 -1050.07,-630.5 -1154.18,-630.5 -1154.19,-669
GND on P1 "GND_L02_P173" (solid, pour order 173): -1246.25,42 -1246.25,-758 -844,-758 -844,42
BMB2 on P1 "NONET_L01_P-001" (solid, pour order 169): -1045,-118 -1181,-118 -1311,-248 -1442,-248 -1442,40 -1045,40
BMB1 on P1 "NONET_L01_P-001" (solid, pour order 167): -1223,-171 -1263,-171 -1297,-205 -1297.5,-245.5 -1308,-256 -1367,-256 -1433.72,-256 -1433.72,-362 -1045,-362.01 -1045,-57 -1045,-51 -1187,-51 -1187,-135
BMA2 on P1 "NONET_L01_P-001" (solid, pour order 163): -1051,-589 -1051,-680 -1442,-680 -1442,-475 -1313,-475 -1199,-589
BMA1 on P1 "NONET_L01_P-001" (solid, pour order 161): -1048,-583 -1048,-366 -1291,-366 -1432,-366 -1432,-465 -1311.98,-465 -1193.97,-583
GND on SIG "GND_L05_P175" (solid, pour order 175): -1444.5,45 -1444.5,-755 -831.5,-755 -831.5,45
GND on Bottom "GND_L06_P197" (solid, pour order 197): -1439.46,42.46 -1439.46,-757.54 -839.47,-757.54 -839.47,42.46 -839.46,42.46
+VM on Bottom "NONET_L01_P-001" (solid, pour order 195): -1248,-559 -1247,-560 -1247,-627 -1231,-643 -1199,-643 -1199,-604 -1192,-597 -1192,-583 -1164,-583 -1164,-556 -1244,-556 -1245,-557
+VM on VMOT "NONET_L01_P-001" (solid, pour order 181): -842,40 -842,-760 -1442,-760 -1442,40
GND on GND "NONET_L01_P-001" (solid, pour order 193): -842,40 -842,-758 -844,-760 -1442,-760 -1442,40

## Keep-outs
Keep-Out Layer:
  the board outline again, w4

## Other copper
Top:
  text "1" at -891,-859 h60
P1:
  text "2" at -846.8,-859 h60
SIG:
  text "5" at -713,-858 h60
VMOT:
  text "3" at -806,-857 h60
GND:
  text "4" at -761,-858 h60
Bottom:
  text "6" at -670,-859 h60

## Silkscreen, mask and mechanical layers (free items; w line width, h text height)
Top Overlay:
  text "S5160  V1.1" at -1295,-221 h60
  text "FYSETC" at -1254,-498 h60
  text "EN" at -803,-728 h60
  text "VM" at -1556,-731 h60
  text "ENCN" at -1275,-913.95 h60 r90
  text "ENCB" at -976,-915.56 h60 r90
  text "ENCA" at -1176,-918 h60 r90
  text "DIAG0" at -1074,-927.55 h60 r90
Bottom Overlay:
  text "GND" at -1217,-30 h60
  text "DIR" at -954,-32 h60